# Altium PCB mb997.PcbDoc (part 4 of 4)
Units mil, origin at the board's own origin, x right, y up, seen from the top; angles counter-clockwise.
Board outline 2598.43 x 3818.9 mil, 2 copper layers (Top, Bottom), stack 62.402 mil thick; 189 components, 183 nets, 746 pads, 491 vias.
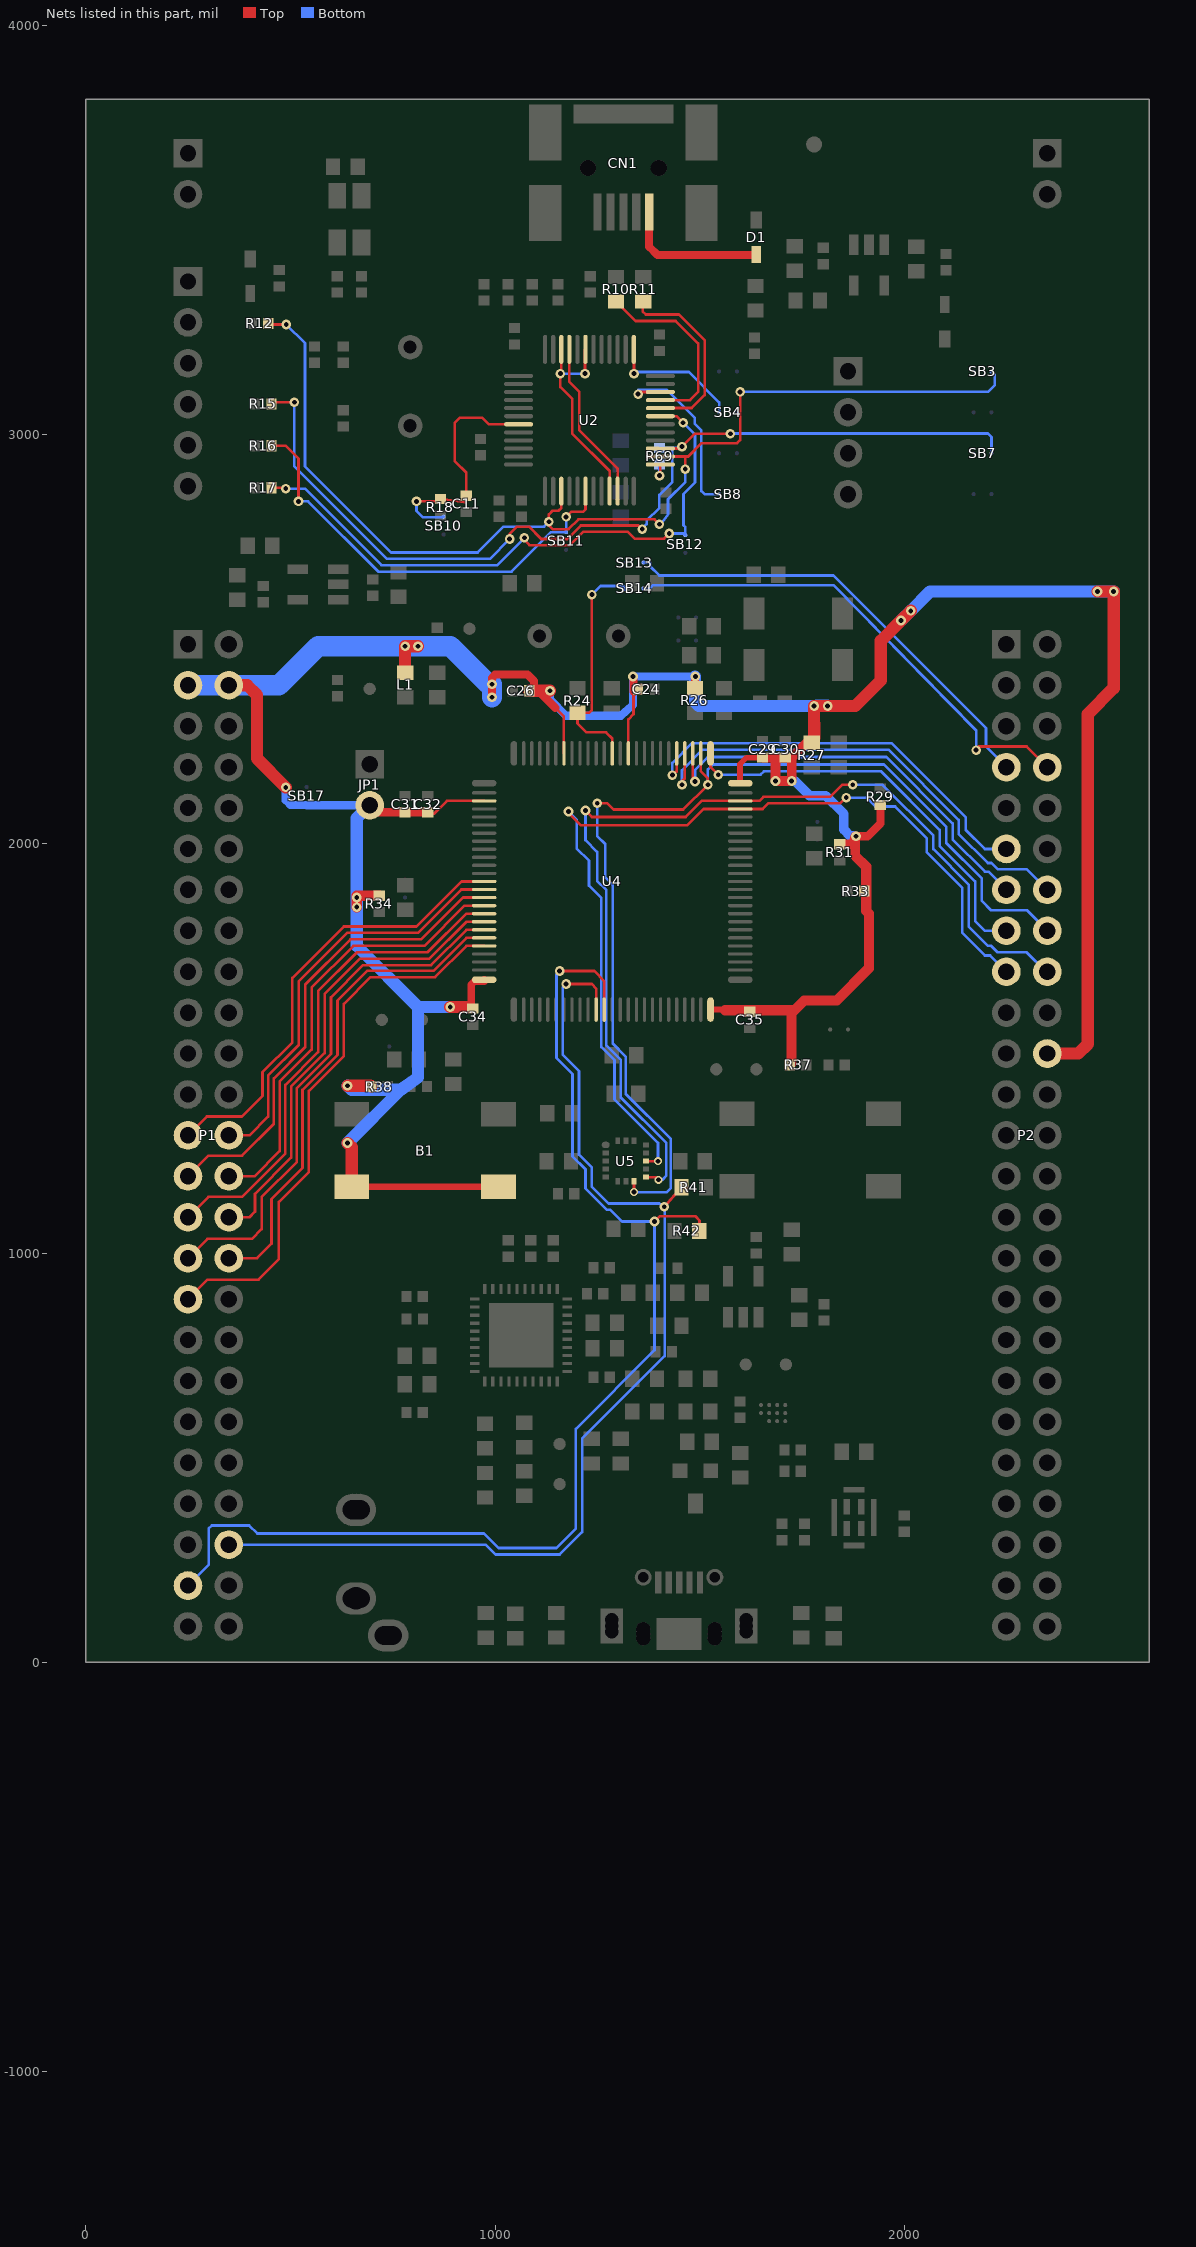
[diagram p4: the nets of this part, all layers, seen from the top]

## Via types
v1: diameter 23.62, hole 11.81, Top to Bottom, 484 vias
v2: diameter 19.68, hole 11.81, Top to Bottom, 7 vias

## Nets (pads, with @x,y where several pads share a name; then routed paths per layer and width w, separated by ;. In a path a pad name is that pad's centre, name@x,y a point inside that pad or via, vN(x,y) a via of type N, cw(c..) or ccw(c..) an arc to the next point about the centre after c; other vN are vias at no path point) (continued)
PD14: P1.46 R41.2 U4.61 | length 2702.5
  Top w6.5: v1(1173.23,1657.48) 1236.25,1657.48 1246.59,1645.95 U4.61@1246.59,1594.96 ; v1(1413.21,1112.9) R41.2@1455.21,1160.9
  Bottom w6.5: P1.46@349.21,287.4 976.54,287.4 1000.65,263.3 1157.55,263.3 1212.64,318.39 1212.64,546.62 1414.21,748.19 1414.21,1117.9 v1(1413.21,1112.9) 1403.75,1118.9 1401.52,1121.13 1276.71,1121.13 1236.25,1161.59 1236.25,1208.66 1204.72,1240.19 1204.72,1444.88 1165.35,1484.25 1165.35,1649.61 v1(1173.23,1657.48)
PD15: P1.47 R42.2 U4.62 | length 3032.8
  Top w6.5: v1(1157.48,1688.98) 1242.67,1688.98 1266.28,1664.16 U4.62@1266.28,1594.96 ; v1(1389.21,1076.9) 1402.21,1089.9 1488.83,1089.9 1499.21,1079.52 R42.2@1498.21,1053.9
  Bottom w6.5: P1.47@249.21,187.4 299.72,237.91 299.72,326.26 307.59,334.13 398.91,334.13 418.58,314.45 972.61,314.45 1008.02,279.04 1149.68,279.04 1196.9,326.26 1196.9,570.23 1389.21,762.54 v1(1389.21,1076.9) 1309.7,1076.9 1281.21,1105.39 1273.01,1105.39 1220.51,1157.89 1220.51,1204.72 1188.98,1236.26 1188.98,1437.01 1149.61,1476.38 1149.61,1681.1 v1(1157.48,1688.98)
PE0: P2.17 U4.97 U5.11 | length 2349.7
  Top w6.5: v1(1179.21,2078.9) 1179.21,2075.11 1209.21,2045.11 1469.21,2045.11 1509.21,2085.11 U4.97@1598.96,2085.11 1653.36,2085.11 1667.06,2098.81 1842.24,2098.81 1856.18,2112.75 v1(1857.98,2112.75) ; U5.11@1368.43,1224.8 1368.43,1224.41 v2(1397.64,1224.41)
  Bottom w6.5: v1(1179.21,2078.9) 1199.21,2058.9 1199.21,1988.9 1229.21,1958.9 1229.21,1897.64 1259.37,1867.48 1259.37,1503.46 1291.34,1471.5 1291.34,1375.47 1397.64,1269.18 v2(1397.64,1224.41) ; v1(1857.98,2112.75) 1907.01,2112.75 1928.81,2090.95 1977.16,2090.95 2054.73,2013.38 2054.73,1978.96 2141.3,1892.39 2141.3,1782.21 2196.39,1727.12 2209.5,1727.12 P2.17@2249.21,1687.4
PE1: P2.18 U4.98 U5.9 | length 2471.2
  Top w6.5: v1(1220.51,2081.27) 1236.25,2065.53 1465.31,2065.53 1504.58,2104.8 U4.98@1598.96,2104.8 1645.49,2104.8 1655.59,2114.9 1818.63,2114.9 1847.96,2144.23 v1(1873.72,2144.23) ; U5.9@1368.43,1185.43 1399.21,1185.43 v2(1399.21,1178.9)
  Bottom w6.5: v1(1220.51,2081.27) 1220.51,2008.9 1249.21,1980.2 1249.21,1909.45 1271.65,1887.01 1271.65,1507.24 1306.46,1472.44 1306.46,1380.63 1418.19,1268.9 1418.19,1188.9 1408.19,1178.9 v2(1399.21,1178.9) ; v1(1873.72,2144.23) 1946.38,2144.23 2070.47,2020.14 2070.47,1986.83 2157.04,1900.26 2157.04,1797.95 2204.26,1750.73 2212.13,1750.73 2227.87,1734.99 2298.7,1734.99 2346.29,1687.4 P2.18@2349.21,1687.4
PE2: P2.15 U4.1 | length 1009.2
  Top w6.5: U4.1@1526.12,2220.94 1526.12,2186.9 1527.21,2186.9 v1(1545.21,2168.9)
  Bottom w6.5: v1(1545.21,2168.9) 1648.53,2168.9 1656.53,2176.9 1943.36,2176.9 2086.21,2034.05 2086.21,1994.7 2172.78,1908.13 2172.78,1811.01 2196.39,1787.4 P2.15@2249.21,1787.4
PE3: P2.16 U4.2 U5.8 | length 2616.6
  Top w6.5: v1(1249.21,2098.9) 1274.18,2098.9 1289.21,2083.87 1459.21,2083.87 v1(1519.57,2144.23) 1519.57,2159.97 1502.5,2177.04 U4.2@1502.5,2220.94 ; U5.8@1338.9,1175.59 1339.21,1175.28 v2(1339.21,1148.9)
  Bottom w6.5: v1(1249.21,2098.9) 1249.21,2018.9 1269.21,1998.9 1269.21,1917.32 1287.24,1899.29 1287.24,1511.65 1318.9,1480 1318.9,1389.21 1429.21,1278.9 1429.21,1158.9 1419.21,1148.9 v2(1339.21,1148.9) ; v1(1519.57,2144.23) 1519.57,2181.44 1532.03,2193.9 1949.97,2193.9 2101.95,2041.92 2101.95,2002.57 2188.52,1916 2188.52,1860.91 2211.83,1837.6 2299.01,1837.6 P2.16@2349.21,1787.4
PE4: P2.13 U4.3 | length 1034.1
  Top w6.5: U4.3@1482.81,2220.94 1482.81,2152.1 v1(1488.09,2152.1)
  Bottom w6.5: v1(1488.09,2152.1) 1488.09,2180.43 1519.56,2211.9 1955.58,2211.9 2117.69,2049.79 2117.69,2010.44 2196.39,1931.74 2204.88,1931.74 P2.13@2249.21,1887.4
PE5: P2.14 U4.4 | length 1190.1
  Top w6.5: v1(1456.61,2144.23) 1456.61,2153.45 1463.13,2159.97 U4.4@1463.13,2220.94
  Bottom w6.5: v1(1456.61,2144.23) 1456.61,2179.67 1506.84,2229.9 1961.19,2229.9 2132.58,2058.51 2132.58,2024.48 2203.84,1953.23 2212.56,1953.23 2227.87,1937.91 2298.7,1937.91 P2.14@2349.21,1887.4
PE6: P2.11 U4.5 | length 1050.3
  Top w6.5: v1(1433,2167.84) 1440.87,2175.71 1443.44,2175.71 U4.5@1443.44,2220.94
  Bottom w6.5: v1(1433,2167.84) 1433,2197.9 1481,2245.9 1968.8,2245.9 2149.46,2065.24 2149.46,2034.33 2196.39,1987.4 P2.11@2249.21,1987.4
PE7: P1.25 U4.38 | length 1106.9
  Top w6.5: P1.25@249.21,1287.4 295.43,1333.62 381.21,1333.62 431.21,1383.62 431.21,1441.77 504.34,1514.9 504.34,1672.03 630.26,1797.95 807.52,1797.95 917.52,1907.95 U4.38@972.97,1907.95
PE8: P1.26 U4.39 | length 1022.5
  Top w6.5: P1.26@349.21,1287.4 399.21,1287.4 445.21,1333.4 445.21,1434.03 520.08,1508.9 520.08,1664.16 638.13,1782.21 811.27,1782.21 917.33,1888.26 U4.39@972.97,1888.26
PE9: P1.27 U4.40 | length 1160.4
  Top w6.5: P1.27@249.21,1187.4 299.72,1237.91 381.21,1237.91 459.21,1315.91 459.21,1426.29 535.82,1502.9 535.82,1656.29 646,1766.47 819.14,1766.47 921.25,1868.58 U4.40@972.97,1868.58
PE10: P1.28 U4.41 | length 1085.6
  Top w6.5: P1.28@349.21,1187.4 411.21,1187.4 473.21,1249.4 473.21,1418.55 551.56,1496.9 551.56,1648.42 653.87,1750.73 827.01,1750.73 925.18,1848.89 U4.41@972.97,1848.89
PE11: P1.29 U4.42 | length 1216.8
  Top w6.5: P1.29@249.21,1087.4 299.2,1137.39 381.21,1137.39 487.21,1243.39 487.21,1410.81 567.3,1490.9 567.3,1640.55 661.74,1734.99 835.1,1734.99 929.32,1829.21 U4.42@972.97,1829.21
PE12: P1.30 U4.43 | length 1134.6
  Top w6.5: P1.30@349.21,1087.4 399.21,1087.4 413.02,1101.21 413.02,1144.7 501.21,1232.9 501.21,1406.9 583.04,1488.73 583.04,1632.68 669.61,1719.25 839.05,1719.25 929.32,1809.52 U4.43@972.97,1809.52
PE13: P1.31 U4.44 | length 1288.5
  Top w6.5: P1.31@249.21,987.4 296.37,1034.56 405.21,1034.56 429.21,1058.56 429.21,1136.9 515.21,1222.9 515.21,1402.9 598.78,1486.47 598.78,1624.81 677.48,1703.51 842.99,1703.51 929.32,1789.84 U4.44@972.97,1789.84
PE14: P1.32 U4.45 | length 1201.5
  Top w6.5: P1.32@349.21,987.4 417.77,987.4 453.24,1022.87 453.24,1131.9 529.21,1207.87 529.21,1398.9 614.52,1484.21 614.52,1616.94 687.2,1689.61 848.78,1689.61 929.32,1770.15 U4.45@972.97,1770.15
PE15: P1.33 U4.46 | length 1353.7
  Top w6.5: P1.33@249.21,887.4 296.89,935.08 421.39,935.08 471.21,984.9 471.21,1124.9 544.71,1198.4 544.71,1396.4 630.26,1481.95 630.26,1609.07 695.27,1674.08 853.19,1674.08 929.58,1750.47 U4.46@972.97,1750.47
PH0: P2.7 SB13.2 | length 1126.1
  Bottom w6.5: SB13.2@1362.18,2687.26 1378.81,2687.26 1378.81,2678.18 1401.21,2655.78 1826.5,2655.78 2199.21,2283.07 2199.21,2237.4 P2.7@2249.21,2187.4
PH1: P2.8 SB14.2 | length 1214
  Top w6.5: v1(2175.21,2228.9) 2181.21,2234.9 2181.21,2237.91 2298.7,2237.91 P2.8@2349.21,2187.4
  Bottom w6.5: SB14.2@1362.18,2624.3 1377.97,2624.3 1385.84,2632.17 1826.5,2632.17 2175.21,2277.46 v1(2175.21,2228.9)
PH1-OSC_OUT: R24.2 SB14.1 U4.13 | length 588.8
  Top w6.5: v1(1236.21,2608.9) 1236.21,2326.9 1229.21,2319.9 R24.2@1201.21,2319.9 1201.21,2293.9 1222.84,2272.27 1270.59,2272.27 1285.96,2256.9 U4.13@1285.96,2220.94
  Bottom w6.5: v1(1236.21,2608.9) 1257.21,2629.9 1313.21,2629.9 1313.21,2618.63 ; 1311.84,2617.27 1313.21,2618.63 ; SB14.1@1318.88,2624.3 1313.21,2618.63
STM_JTCK: SB4.2 U2.37 | length 324.4
  Top w6.5: U2.37@1338.61,3208.23 1338.61,3198.9 1339.21,3198.29 v1(1339.21,3148.9)
  Bottom w6.5: v1(1339.21,3148.9) 1343.21,3152.89 1473.21,3152.89 1547.2,3078.9 SB4.2@1547.2,3054.37
STM_JTMS: SB8.2 U2.34 | length 468.1
  Top w6.5: v1(1349.21,3098.9) 1349.21,3103.59 1348.91,3103.9 U2.34@1403.57,3103.9
  Bottom w6.5: v1(1349.21,3098.9) 1349.21,3108.9 1419.21,3108.9 1487.96,3040.15 1487.96,3026.02 1503.83,3010.15 1503.83,2862.24 1511.7,2854.37 SB8.2@1547.2,2854.37
STM_RST: C11.2 R18.1 SB10.2 U2.7 | length 591.6
  Top w6.5: v1(807.81,2836.7) 856.53,2836.7 R18.1@866.14,2842.83 924.81,2834.96 928.27,2838.42 929.21,2838.42 C11.2@929.13,2850.71 929.21,2906.9 901.41,2934.7 901.41,3029.24 913.58,3041.41 968.16,3041.41 984.41,3025.16 U2.7@1057.11,3025.16
  Bottom w6.5: v1(807.81,2836.7) 807.81,2813.3 823.41,2797.7 870.21,2797.7 871.73,2799.21 SB10.2@874.02,2799.21
SWIM: U2.22 U2.45 | length 395.4
  Top w6.5: U2.45@1181.13,3208.23 1181.13,3128.92 1205.23,3104.82 1205.23,3011.33 1299.24,2917.32 U2.22@1299.24,2861.77
SWIM_IN: U2.21 U2.43 U2.46 | length 517.1
  Top w6.5: U2.46@1161.44,3208.23 1161.44,3153.54 1159.21,3151.32 v1(1159.21,3148.9) 1159.21,3116.4 1188.01,3087.6 1188.01,3003.14 1279.55,2911.6 U2.21@1279.55,2861.77 ; v1(1219.21,3148.9) 1219.21,3206.94 U2.43@1220.5,3208.23
  Bottom w6.5: v1(1159.21,3148.9) v1(1219.21,3148.9)
T_JTCK: R12.2 SB3.1 U2.15 U2.26 | length 2706.2
  Top w6.5: R12.2@445.2,3271.65 447.95,3268.9 v1(489.21,3268.9) ; U2.15@1161.44,2861.77 1161.44,2821.1 1154.17,2813.82 1140.14,2813.82 1131.21,2804.9 v1(1131.21,2786.9) 1131.21,2777.9 1140.21,2768.9 1179.21,2768.9 1203.21,2792.9 1389.21,2792.9 v1(1401.21,2780.9) ; U2.26@1403.57,2946.42 1464.48,2946.42 ; v1(1464.48,2915.49) 1464.48,2946.42 ; v1(1598.43,3104.37) 1598.43,2986.4 1590.93,2978.9 1504.19,2978.9 1471.71,2946.42 1464.48,2946.42
  Bottom w6.5: v1(489.21,3268.9) 535.31,3223.3 535.31,2922 745.41,2711.9 957.21,2711.9 1020.21,2774.9 1119.21,2774.9 v1(1131.21,2786.9) ; v1(1401.21,2780.9) 1404.38,2780.9 1422.38,2804.9 1422.38,2841.91 1464.48,2884.01 v1(1464.48,2915.49) ; v1(1598.43,3104.37) 2204.72,3104.37 2220.47,3120.12 2220.47,3146.46 SB3.1@2212.56,3154.37
T_JTMS: R15.2 R69.2 SB7.1 U2.27 | length 2380.6
  Top w6.5: R15.2@453.07,3074.8 457.17,3078.9 v1(509.21,3078.9) ; v1(1035.21,2744.9) 1035.21,2756.9 1053.21,2774.9 1082.49,2774.9 1112.49,2744.9 1176.21,2744.9 1209.21,2777.9 1350.21,2777.9 v1(1359.21,2768.9) ; U2.27@1403.57,2966.1 1448.74,2966.1 v1(1456.61,2970.58) 1488.09,3002.06 v1(1574.66,3002.06)
  Bottom w6.5: v1(509.21,3078.9) 509.21,2922.5 735.41,2696.3 987.21,2696.3 1035.21,2744.3 v1(1035.21,2744.9) ; v1(1359.21,2768.9) 1359.21,2770.07 1370.04,2780.9 1370.04,2789.57 1401.13,2820.66 1401.13,2852.14 1433,2884.01 1433,2966.97 ; R69.2@1401.52,2966.97 1433,2966.97 ; v1(1456.61,2970.58) 1456.61,2968.77 1454.81,2966.97 1433,2966.97 ; v1(1574.66,3002.06) 1575.09,3002.48 2204.26,3002.48 2212.56,2994.19 SB7.1@2212.56,2954.37
T_NRST: R16.2 SB11.1 U2.18 | length 1085.7
  Top w6.5: R16.2@453.07,2972.44 488.19,2972.44 519.21,2941.42 v1(519.21,2836.7) ; v1(1173.21,2798.9) 1185.57,2811.26 1214.85,2811.26 1220.5,2816.9 U2.18@1220.5,2861.77
  Bottom w6.5: v1(519.21,2836.7) 542.61,2836.7 714.21,2665.1 1040.21,2665.1 1136.7,2761.58 SB11.1@1173.21,2761.58 v1(1173.21,2798.9)
T_SWDIO_IN: R69.1 U2.25 | length 56.2
  Top w6.5: v1(1401.52,2899.75) 1403.57,2899.75 U2.25@1403.57,2926.73
  Bottom w6.5: v1(1401.52,2899.75) R69.1@1401.52,2926.97
T_SWO: R17.2 SB12.1 U2.31 | length 1519.3
  Top w6.5: R17.2@453.07,2870.08 485.83,2870.08 v1(488.01,2867.9) ; v1(1071.21,2747.9) 1071.21,2741.9 1083.21,2729.9 1182.21,2729.9 1215.21,2762.9 1323.21,2762.9 1340.58,2745.53 1412.58,2745.53 v1(1425.13,2758.09) ; U2.31@1403.57,3044.84 1443.27,3044.84 v1(1459.21,3028.9)
  Bottom w6.5: v1(488.01,2867.9) 534.81,2867.9 722.01,2680.7 1005.21,2680.7 1071.21,2746.7 v1(1071.21,2747.9) ; v1(1425.13,2758.09) 1460.56,2758.09 SB12.1@1464.48,2754.16 1464.48,2773.83 1460.23,2778.08 1460.23,2854.85 1488.09,2882.71 1488.09,3000.02 v1(1459.21,3028.9)
U5V: CN1.1 D1.1 | length 354.8
  Top w19.68: CN1.1@1376.23,3543.35 1376.23,3458.9 1396.23,3438.9 1636.46,3438.9 D1.1@1637.76,3440.2
USB_DM: R11.2 U2.32 | length 462.5
  Top w6.5: R11.2@1362.17,3325.16 1360.21,3325.16 1360.21,3301.12 1368.08,3293.25 1449.12,3293.25 1511.7,3230.66 1511.7,3096.5 1480.22,3065.02 1403.57,3065.02 U2.32@1403.57,3064.53
USB_DP: R10.2 U2.33 | length 462.1
  Top w6.5: R10.2@1295.24,3325.16 1342.89,3277.51 1440.87,3277.51 1495.96,3222.42 1495.96,3104.37 1475.81,3084.21 U2.33@1403.57,3084.21
VDD: B1.3 B1.4 C24.1 C26.2 C29.2 C30.2 C31.2 C32.2 C34.2 C35.1 JP1.2 L1.1 P1.3 P1.4 P2.22 R26.1 R27.2 R29.1 R31.2 R33.1 R34.1 R37.2 R38.2 SB17.2 U4.11 U4.19 U4.28 U4.50 U4.75 U4.100 | length 9415.6
  Top w6.5: C32.2@834.88,2077.01 838.49,2073.4 850.7,2073.4 882.1,2104.8 U4.28@972.97,2104.8 ; 1102.36,2374.02 1104.86,2374.02 ; 1146.81,2332.06 1167.85,2311.02 U4.19@1167.85,2220.94 ; U4.11@1325.33,2220.94 1325.33,2303.9 1338.11,2316.68 C24.1@1338.11,2372.4 ; 1685.04,2208.66 1685.04,2210.16 ; 1879.42,1971.09 1880.51,1970 ; R33.1@1901.59,1884.52 1901.59,1918.01 1906.43,1922.85
  Top w13.78: U4.100@1598.96,2148.11 1598.96,2151.41 1598.27,2152.1 1598.27,2194.75 1614.01,2210.49 1636.76,2210.49 C29.2@1653.36,2210.8
  Top w15: U4.75@1526.12,1594.96 1559.75,1594.96 1561.71,1592.99
  Top w15.75: B1.3@649.62,1161.92 B1.4@1007.89,1161.92
  Top w18: C34.2@937.19,1601.2 940.8,1597.59 C34.2@941.87,1596.52 ; C34.2@945.06,1597.59 C34.2@941.87,1596.52 ; U4.50@972.97,1667.79 972.97,1664.16 949.74,1664.16 941.87,1656.29 C34.2@941.87,1596.52
  Top w19.68: v1(992.13,2358.27) v1(992.13,2389.76) 992.13,2405.51 1000,2413.39 1078.74,2413.39 1094.49,2397.64 C26.2@1094.49,2374.02 ; v1(1336.71,2408.9) 1337.37,2408.16 1338.11,2407.42 1338.11,2372.4 1339.05,2371.46 1340.53,2372.4 C24.1@1349.21,2377.9 ; R26.1@1488.19,2380.39 1488.19,2407.87 v1(1489.21,2408.9)
  Top w20: JP1.2@693.22,2094.23 710.44,2077.01 C31.2@779.79,2077.01 C32.2@834.88,2077.01 ; 1104.86,2374.02 1119.36,2359.52 1146.81,2332.06 ; v1(1881.59,2018.31) 1909.73,2018.31 1941.21,2049.79 R29.1@1941.21,2094.9
  Top w23.62: C29.2@1653.36,2210.8 1685.04,2210.16 C30.2@1708.45,2210.8 1724.41,2210.16 ; v1(1685.04,2153.54) v1(1724.41,2153.54) 1724.41,2210.16 ; R27.2@1773.21,2246.9 1773.14,2246.26 1760.51,2246.26 1724.41,2210.16 ; R31.2@1842.24,1998.96 1875.16,1998.96 v1@1879.42,2018.31 ; 1879.42,1971.09 v1@1879.42,2018.31 ; v1(1881.59,2018.31) v1@1879.42,2018.31
  Top w25: v1(661.74,1845.17) v1(661.74,1868.78) 661.74,1873.04 R34.1@716.83,1873.04 ; 1561.71,1592.99 1637.8,1592.99 ; C35.1@1621.88,1589.72 1637.8,1592.99 ; v1(1685.04,2153.54) 1685.04,2208.66 ; R37.2@1719.93,1459.54 1724.05,1463.65 1724.05,1483.16 1723.95,1522.5 1723.95,1585.46 ; 1880.51,1970 1906.43,1944.07 1906.43,1922.85 1906.43,1836.07 1913.07,1829.43 1913.07,1695.64 1834.37,1616.94 1755.43,1616.94 1723.95,1585.46 ; 1637.8,1592.99 1723.95,1592.99 1723.95,1585.46
  Top w30: P1.4@349.21,2387.4 394.16,2387.4 417.77,2363.79 417.77,2208.21 v1(488.19,2137.8) ; v1(639.21,1268.9) 649.62,1258.49 B1.3@649.62,1161.92 ; v1(639.21,1408.9) 695.21,1408.9 R38.2@697.21,1406.9 ; L1.1@779.79,2418.2 v1(779.79,2482.64) v1(811.27,2482.64) ; v1(889.97,1601.2) C34.2@937.19,1601.2 ; C26.2@1082.99,2374.02 1094.49,2374.02 1102.36,2374.02 ; 1104.86,2374.02 v1(1133.86,2374.02) ; R27.2@1773.21,2246.9 1773.67,2253.12 1779.53,2258.98 v1(1779.21,2336.9) 1785.2,2336.66 1879.59,2336.66 1942.04,2399.11 1942.04,2495.86 v1(1991.77,2545.6) v1(2015.38,2569.21) ; P2.22@2349.21,1487.4 2424.62,1487.4 2448.23,1511.01 2448.23,2317.37 2511.19,2380.33 v1(2511.19,2616.43) v1(2471.84,2616.43)
  Bottom w6.5: v1@1133.86,2372.46 v1(1133.86,2374.02)
  Bottom w19.68: v1(488.19,2137.8) 488.19,2106.3 499.21,2095.28 SB17.2@539.21,2095.28 540.26,2094.23 JP1.2@693.22,2094.23 ; v1@1133.86,2372.46 1133.86,2352.33 1173.29,2312.9 1307.08,2312.9 1334.1,2336.51 ; v1(1336.71,2408.9) 1488.09,2408.9 v1(1489.21,2408.9)
  Bottom w20: 1334.1,2336.51 1336.71,2339.13 v1(1336.71,2408.9)
  Bottom w23.62: 1708.66,2153.54 v1(1724.41,2153.54) 1732.06,2153.54 1768.08,2117.53 1807.67,2117.53 1851.8,2073.4 1851.8,2034.64 1867.54,2018.9 1878.5,2018.9 v1(1881.59,2018.31)
  Bottom w25: v1(1685.04,2153.54) 1708.66,2153.54
  Bottom w30: v1(639.21,1268.9) 769.21,1398.9 ; v1(639.21,1408.9) 649.21,1398.9 769.21,1398.9 ; JP1.2@693.22,2094.23 661.74,2062.75 v1(661.74,1868.78) v1(661.74,1845.17) 661.74,1750.73 811.27,1601.2 ; v1(889.97,1601.2) 811.27,1601.2 ; v1@1488.09,2408.9 1488.09,2346.02 1497.21,2336.9 1503.21,2336.96 v1@1779.52,2336.96 ; v1(1779.21,2336.9) v1@1779.52,2336.96 ; v1(1812.21,2336.9) 1812.15,2336.96 1811.06,2338.05 v1@1784.99,2338.05 ; v1(1991.77,2545.6) v1(2015.38,2569.21) 2062.6,2616.43 v1(2471.84,2616.43) v1(2511.19,2616.43) ; 769.21,1398.9 811.27,1428.9 811.27,1601.2 ; v1@1779.52,2336.96 1783.9,2336.96 v1@1784.99,2338.05 ; v1@1779.52,2336.96 v1@1784.99,2338.05
  Bottom w50: P1.3@249.21,2387.4 P1.4@349.21,2387.4 471.69,2387.4 566.93,2482.64 v1(779.79,2482.64) v1(811.27,2482.64) 890.76,2482.64 983.63,2389.76 v1(992.13,2389.76) v1(992.13,2358.27)
pads on no net: CN1.6 CN1.7 CN1.8 CN1.9 CN1.10 CN1.11 CN1.12 CN5.0/3 CN5.0/4 CN5.0/5 CN5.6 CN5.6/2 CN5.6/3 CN5.6/4 CN5.6/5 CN5.6/6 P1.48 U2.4 U2.11 U2.12 U2.13 U2.14 U2.16 U2.17 U2.19 U2.28 U2.38 U2.39 U2.40 U2.41 U2.42 U5.2 U5.3 U7.4 U7.6 U7.7 U7.9 U7.20 U7.23 U7.24 U7.25 U7.26 U7.36 U8.A2 U8.B1 U8.B2 U8.C2 X3.2 X3.3

## Polygon pours and split planes (outlines as drawn)
GND on Bottom "Bottom-GND" (hatched 45Degree grid 11.81 track 13.78, remove dead copper, pour order 0): 6.89,3793.11 2591.54,3793.11 2591.54,6.89 6.89,6.89
GND on Top "Top-GND" (hatched 45Degree grid 11.81 track 13.78, remove dead copper, pour order 2): 6.89,3785.24 2591.54,3785.24 2591.54,6.89 6.89,6.89

## Keep-outs
Top:
  region: 1516,118 1577,118 1577,77 1516,77
Bottom:
  circle w7.87: c1779.41,3709.21 r29.33
Keep-Out Layer:
  the board outline again, w10

## Other copper
Top:
  pour cut-out: 1110.7,503.8 1110.7,381.8 1203.7,381.8 1203.7,503.8
  pour cut-out: 1778.78,774.41 1656.78,774.41 1656.78,681.41 1778.78,681.41
  pour cut-out: 1706.76,1495.68 1584.76,1495.68 1584.76,1402.68 1706.76,1402.68
  pour cut-out: 791.47,1616.5 669.47,1616.5 669.47,1523.5 791.47,1523.5
  pour cut-out: 983.79,2456.83 983.79,2578.83 890.79,2578.83 890.79,2456.83
  pour cut-out: 740,2408 740,2530 647,2530 647,2408
  text "TOP Layer" at -33,-1009.81 h118.11
  text ".GTL" at 1643,-1016.69 h118.11
Bottom:
  pour cut-out: 1747.93,2033.42 1824.93,2033.42 1824.93,2103.42 1747.93,2103.42
  pour cut-out: 741,1888 818,1888 818,1958 741,1958
  text "Bottom Layer" at 2736.5,-997.81 h118.11
  text ".GBL" at 1054,-1010.69 h118.11

## Silkscreen, mask and mechanical layers (free items; w line width, h text height)
Silkscreen Top:
  circle w12: c2165.35,2555.12 r15.75
  circle w12: c165.35,3374.02 r17.61
  circle w12: c2165.35,2555.12 r7.87
  circle w12: c157.48,2547.24 r7.87
  circle w12: c1850.39,3232.28 r7.87
  circle w12: c2165.35,2555.12 r17.61
  circle w12: c1850.39,3232.28 r15.75
  circle w12: c165.35,3374.02 r15.75
  circle w12: c1850.39,3232.28 r7.87
  circle w12: c157.48,2547.24 r15.75
  circle w12: c165.35,3374.02 r7.87
  circle w12: c157.48,2547.24 r7.87
  circle w12: c2165.35,2555.12 r7.87
  circle w12: c157.48,2547.24 r17.61
  circle w12: c1850.39,3232.28 r17.61
  circle w12: c165.35,3374.02 r7.87
  lines w5: 442.52,3435.72 462.97,3435.72 ; 678.87,2305.89 707,2305.89 ; 692.94,2295.66 692.94,2316.11 ; 883.35,1569.44 903.81,1569.44 ; 893.58,1555.37 893.58,1583.5 ; 922.66,2354.72 950.78,2354.72 ; 936.72,2344.49 936.72,2364.94 ; 1143.7,605.92 1171.82,605.92 ; 1157.76,595.69 1157.76,616.14 ; 1457.32,1449.18 1477.77,1449.18 ; 1467.55,1435.12 1467.55,1463.24 ; 1529.34,727.91 1549.79,727.91 ; 1539.57,713.85 1539.57,741.97 ; 1678.7,3531.03 1699.15,3531.03 ; 2036.98,3226.53 2057.44,3226.53
  lines w6: 330.71,2704.72 342.52,2692.91 417.32,2692.91 431.1,2679.13 431.1,2673.23 ; 803.15,2578.74 858.27,2578.74 874.02,2594.49 ; 897.84,3419.17 897.84,3379.82 937.19,3379.82 ; 968.67,1388.71 976.54,1380.84 1047.37,1380.84 1070.98,1404.45 ; 1430.55,502.5 1430.55,612.5 ; 1440.87,2466.9 1433,2474.77 1433,2561.34 1472.35,2600.69 ; 1629.75,664.67 1637.62,672.54 1763.54,672.54
  lines w10: 0,0 2598.42,0 2598.42,3818.9 0,3818.9 0,0
  lines w19.68: 1754.92,2833.66 1792.42,2833.66 1792.42,2968.66 1754.92,2968.66 1754.92,2833.66 ; 1754.92,3059.41 1792.42,3059.41 1792.42,3194.41 1754.92,3194.41 1754.92,3059.41
  lines w39.37: 1942.42,2845.1 1964.92,2845.1 1964.92,2965.1 1942.42,2965.1 1942.42,2845.1 ; 1942.42,3070.47 1964.92,3070.47 1964.92,3190.47 1942.42,3190.47 1942.42,3070.47
  text "STM32F407G-DISC1" at 340,3706 h110.24
  text "COM" at 736.18,3496.89 h55
  text "MB997E" at 2199.21,3260.36 h118.11
  text "PWR" at 1549.21,3248.9 h78.74 r90
  text "SWD" at 165.35,3082.68 h118.11 r90
  text "ST-LINK" at 1719.21,2878.9 h98.43 r90
  text "DISCOVERY" at 2061,2835 h98.43 r90
  text "J" at 2147,2833.5 h600
  text "www.st.com/stm32f4-discovery" at 670.17,2703.33 h118.11
  text "GND" at 39.37,2468.9 h78.74
  text "GND" at 413.39,2468.9 h78.74
  text "GND" at 2047.24,2468.9 h78.74
  text "GND" at 2421.26,2468.9 h78.74
  text "VDD" at 39.37,2368.9 h78.74
  text "VDD" at 413.39,2368.9 h78.74
  text "5V" at 2047.24,2368.9 h78.74
  text "5V" at 2421.26,2368.9 h78.74
  text "GND" at 39.37,2268.9 h78.74
  text "NRST" at 413.39,2268.9 h78.74
  text "3V" at 2047.24,2268.9 h78.74
  text "3V" at 2421.26,2268.9 h78.74
  text "PC1" at 39.37,2168.9 h78.74
  text "PC0" at 413.39,2168.9 h78.74
  text "PH0" at 2047.24,2168.9 h78.74
  text "PH1" at 2421.26,2168.9 h78.74
  text "PC3" at 39.37,2068.9 h78.74
  text "PC2" at 413.39,2068.9 h78.74
  text "PC14" at 2047.24,2068.9 h78.74
  text "PC15" at 2421.26,2068.9 h78.74
  text "Idd" at 637.8,1972.44 h78.74
  text "PA1" at 39.37,1968.9 h78.74
  text "PA0" at 413.39,1968.9 h78.74
  text "PE6" at 2047.24,1968.9 h78.74
  text "PC13" at 2421.26,1968.9 h78.74
  text "PA3" at 39.37,1868.9 h78.74
  text "PA2" at 413.39,1868.9 h78.74
  text "PE4" at 2047.24,1868.9 h78.74
  text "PE5" at 2421.26,1868.9 h78.74
  text "PA5" at 39.37,1768.9 h78.74
  text "PA4" at 413.39,1768.9 h78.74
  text "PE2" at 2047.24,1768.9 h78.74
  text "PE3" at 2421.26,1768.9 h78.74
  text "PA7" at 39.37,1668.9 h78.74
  text "PA6" at 413.39,1668.9 h78.74
  text "PE0" at 2047.24,1668.9 h78.74
  text "PE1" at 2421.26,1668.9 h78.74
  text "PC5" at 39.37,1568.9 h78.74
  text "PC4" at 413.39,1568.9 h78.74
  text "PB8" at 2047.24,1568.9 h78.74
  text "PB9" at 2421.26,1568.9 h78.74
  text "PB1" at 39.37,1468.9 h78.74
  text "PB0" at 413.39,1468.9 h78.74
  text "BOOT0" at 2007.87,1468.9 h78.74
  text "VDD" at 2421.26,1468.9 h78.74
  text "GND" at 39.37,1368.9 h78.74
  text "PB2" at 413.39,1368.9 h78.74
  text "PB6" at 2047.24,1368.9 h78.74
  text "PB7" at 2421.26,1368.9 h78.74
  text "PE7" at 39.37,1268.9 h78.74
  text "PE8" at 413.39,1268.9 h78.74
  text "PB4" at 2047.24,1268.9 h78.74
  text "PB5" at 2421.26,1268.9 h78.74
  text "PE9" at 39.37,1168.9 h78.74
  text "PE10" at 413.39,1168.9 h78.74
  text "PD7" at 2047.24,1168.9 h78.74
  text "PB3" at 2421.26,1168.9 h78.74
  text "PE11" at 39.37,1068.9 h78.74
  text "PE12" at 413.39,1068.9 h78.74
  text "User" at 746.21,1068.9 h78.74
  text "PD5" at 2047.24,1068.9 h78.74
  text "PD6" at 2421.26,1068.9 h78.74
  text "Reset" at 1754.21,1054.9 h78.74
  text "PE13" at 39.37,968.9 h78.74
  text "PE14" at 413.39,968.9 h78.74
  text "PD3" at 2047.24,968.9 h78.74
  text "PD4" at 2421.26,968.9 h78.74
  text "PE15" at 39.37,868.9 h78.74
  text "PB10" at 413.39,868.9 h78.74
  text "PD1" at 2047.24,868.9 h78.74
  text "PD2" at 2421.26,868.9 h78.74
  text "PB12" at 413.39,768.9 h78.74
  text "PC12" at 2047.24,768.9 h78.74
  text "PD0" at 2421.26,768.9 h78.74
  text "PB11" at 39.37,767.72 h78.74
  text "PB14" at 413.39,668.9 h78.74
  text "PC10" at 2047.24,668.9 h78.74
  text "PC11" at 2421.26,668.9 h78.74
  text "PB13" at 39.37,665.35 h78.74
  text "PB15" at 39.37,568.9 h78.74
  text "PD8" at 413.39,568.9 h78.74
  text "PA14" at 2047.24,568.9 h78.74
  text "PA15" at 2421.26,568.9 h78.74
  text "PD9" at 39.37,468.9 h78.74
  text "PD10" at 413.39,468.9 h78.74
  text "PA10" at 2047.24,468.9 h78.74
  text "PA13" at 2421.26,468.9 h78.74
  text "PD12" at 413.39,368.9 h78.74
  text "PA8" at 2047.24,368.9 h78.74
  text "PA9" at 2421.26,368.9 h78.74
  text "PD11" at 39.37,366.14 h78.74
  text "PD14" at 413.39,268.9 h78.74
  text "PC8" at 2047.24,268.9 h78.74
  text "PC9" at 2421.26,268.9 h78.74
  text "PD13" at 39.37,263.78 h78.74
  text "PD15" at 39.37,168.9 h78.74
  text "NC" at 413.39,168.9 h78.74
  text "PC6" at 2047.24,168.9 h78.74
  text "PC7" at 2421.26,168.9 h78.74
  text "GND" at 39.37,68.9 h78.74
  text "GND" at 413.39,68.9 h78.74
  text "GND" at 2047.24,68.9 h78.74
  text "GND" at 2421.26,68.9 h78.74
  text "TOP Silksceen Overlay" at -33,-1009.81 h118.11
  text ".GTO" at 1613,-1018.38 h118.11
Silkscreen Bottom:
  lines w7.87: 1507.83,2772.99 1507.83,3192.99 1635.33,3192.99 1635.33,2772.99 1507.83,2772.99 ; 2129.88,2769.06 2129.88,3189.06 2257.38,3189.06 2257.38,2769.06 2129.88,2769.06
  text "DEFAULT" at 2049,2846 h98.43 r270
  text "RESERVED" at 1669,2835 h98.43 r270
  text "I" at 1461,672.01 h500
  text "C" at 1877.08,654.88 h400
  text "E" at 2143.03,642.66 h400
  text "G" at 791.51,636.61 h400
  text "F" at 1080.82,636.13 h400
  text "H" at 1565.03,313.12 h500
  text "Bottom silkscreen Overlay" at 2784,-1008.81 h118.11
  text ".GBO" at 1080,-1013.69 h118.11
Solder Mask Top:
  text "TOP Solder Mask" at -26,-1011.69 h118.11
  text ".GTS" at 1633,-1016.69 h118.11
Solder Mask Bottom:
  text "Bottom Solder Mask" at 2749.91,-998.69 h118.11
  text ".GBS" at 1042,-1006.69 h118.11
Layer_3:
  lines w6: 992.12,1223.9 1559.05,1223.9 ; 1319.21,924.69 1319.21,1491.62 ; 1155.21,1059.06 1155.21,1389.76 1482.21,1389.76 1482.21,1059.06 1155.21,1059.06
Board:
  the board outline again, w10
Drill Drawing:
  circle w10: c3326.33,242.86 r45.3
  lines w1: 0,1909.45 0.03,1909.45 ; 249.21,87.4 249.24,87.4 ; 249.21,2487.4 249.24,2487.4 ; 249.21,3587.4 249.24,3587.4 ; 249.21,3687.4 249.24,3687.4 ; 349.21,87.4 349.24,87.4 ; 1299.21,0 1299.24,0 ; 1299.21,3818.9 1299.24,3818.9 ; 2249.21,87.4 2249.24,87.4 ; 2349.21,87.4 2349.24,87.4 ; 2349.21,3687.4 2349.24,3687.4 ; 2598.43,1909.45 2598.45,1909.45
  lines w10: 3281.04,-187.46 3303.68,-187.46 3326.33,-210.11 3348.98,-187.46 3371.63,-187.46 3348.98,-164.81 3371.63,-142.16 3348.98,-142.16 3326.33,-119.51 3303.68,-142.16 3281.04,-142.16 3303.68,-164.81 3281.04,-187.46 ; 3281.04,84.32 3371.63,84.32 3326.33,-6.27 3281.04,84.32 ; 3281.04,401.4 3371.63,401.4 3371.63,491.99 3281.04,491.99 3281.04,401.4 ; 3281.04,605.24 3326.33,627.89 3371.63,605.24 3348.98,650.53 3371.63,695.83 3326.33,673.18 3281.04,695.83 3303.68,650.53 3281.04,605.24 ; 3281.04,831.72 3303.68,831.72 3303.68,809.07 3348.98,809.07 3348.98,831.72 3371.63,831.72 3371.63,877.02 3348.98,877.02 3348.98,899.67 3303.68,899.67 3303.68,877.02 3281.04,877.02 3281.04,831.72 ; 3281.04,1058.21 3326.33,1012.91 3371.63,1058.21 3326.33,1103.5 3281.04,1058.21 ; 3281.04,1216.75 3281.04,1239.39 3303.68,1262.04 3281.04,1284.69 3281.04,1307.34 3303.68,1307.34 3326.33,1284.69 3348.98,1307.34 3371.63,1307.34 3371.63,1284.69 3348.98,1262.04 3371.63,1239.39 3371.63,1216.75 3348.98,1216.75 3326.33,1239.39 3303.68,1216.75 3281.04,1216.75 ; 3281.04,1420.58 3371.63,1420.58 3371.63,1511.18 3281.04,1511.18 3281.04,1420.58 ; 3299.15,1438.7 3353.51,1438.7 3353.51,1493.06 3299.15,1493.06 3299.15,1438.7
  lines w11.81: 3200.91,-271.26 5736.42,-271.26 ; 3200.91,1563.27 5736.42,1563.27 ; 3724.72,-475.09 3724.72,1767.1 ; 4278.21,-475.09 4278.21,1767.1 ; 5269.12,-475.09 5269.12,1767.1 ; 3200.91,-475.09 5736.42,-475.09 5736.42,1767.1 3200.91,1767.1 3200.91,-475.09
  lines w15: 3249.5,2845.45 3659.41,2845.45 4829.08,2845.45 5688.85,2845.45 6338.68,2845.45 ; 3249.5,2965.45 3659.41,2965.45 4829.08,2965.45 5688.85,2965.45 6338.68,2965.45 ; 3249.5,3085.45 3659.41,3085.45 4829.08,3085.45 5688.85,3085.45 6338.68,3085.45 ; 3249.5,3205.45 3659.41,3205.45 4829.08,3205.45 5688.85,3205.45 6338.68,3205.45 ; 3249.5,3325.45 3659.41,3325.45 4829.08,3325.45 5688.85,3325.45 6338.68,3325.45 ; 3249.5,3445.45 3659.41,3445.45 4829.08,3445.45 5688.85,3445.45 6338.68,3445.45 ; 3249.5,3565.45 6338.7,3565.45 ; 3659.41,3685.45 3659.41,2725.45 ; 4829.08,3685.45 4829.08,2725.45 ; 5688.85,3685.45 5688.85,2725.45 ; 3659.41,2725.45 3249.5,2725.45 3249.5,3685.45 6338.7,3685.45 6338.68,2725.45 ; 3659.41,2725.45 4829.08,2725.45 ; 4829.08,2725.45 5688.85,2725.45 ; 5688.85,2725.45 6338.68,2725.45 ; 6338.68,2725.45 6338.7,2725.45 ; 6338.68,2845.45 6338.7,2845.45 ; 6338.68,2965.45 6338.7,2965.45 ; 6338.68,3085.45 6338.7,3085.45 ; 6338.68,3205.45 6338.7,3205.45 ; 6338.68,3325.45 6338.7,3325.45 ; 6338.68,3445.45 6338.7,3445.45
  text "Layer" at 3309.5,3595.45 h60
  text "Name" at 3719.41,3595.45 h60
  text "Material" at 4889.08,3595.45 h60
  text "Thickness" at 5748.85,3595.45 h60
  text "1" at 3309.5,3475.45 h60
  text "Silkscreen Top" at 3719.41,3475.45 h60
  text "2" at 3309.5,3355.45 h60
  text "Solder Mask Top" at 3719.41,3355.45 h60
  text "Solder Resist" at 4889.08,3355.45 h60
  text "0.020mm" at 5748.85,3355.45 h60
  text "3" at 3309.5,3235.45 h60
  text "Top" at 3719.41,3235.45 h60
  text "Copper" at 4889.08,3235.45 h60
  text "0.018mm" at 5748.85,3235.45 h60
  text "4" at 3309.5,3115.45 h60
  text "Dielectric 1" at 3719.41,3115.45 h60
  text "FR-4" at 4889.08,3115.45 h60
  text "1.550mm" at 5748.85,3115.45 h60
  text "5" at 3309.5,2995.45 h60
  text "Bottom" at 3719.41,2995.45 h60
  text "Copper" at 4889.08,2995.45 h60
  text "0.018mm" at 5748.85,2995.45 h60
  text "6" at 3309.5,2875.45 h60
  text "Solder Mask Bottom" at 3719.41,2875.45 h60
  text "Solder Resist" at 4889.08,2875.45 h60
  text "0.020mm" at 5748.85,2875.45 h60
  text "7" at 3309.5,2755.45 h60
  text "Silkscreen Bottom" at 3719.41,2755.45 h60
  text "Symbol" at 3323.21,1624.42 h118.11
  text "Hit Count" at 3785.87,1624.42 h118.11
  text "Finished Hole Size" at 4339.36,1624.42 h118.11
  text "Plated" at 5330.27,1624.42 h118.11
  text "491" at 3785.87,1420.58 h98.43
  text "0,30mm" at 4339.36,1420.58 h98.43
  text "PTH" at 5330.27,1420.58 h98.43
  text "2" at 3785.87,1216.75 h98.43
  text "0,65mm" at 4339.36,1216.75 h98.43
  text "PTH" at 5330.27,1216.75 h98.43
  text "4" at 3785.87,1012.91 h98.43
  text "0,81mm" at 4339.36,1012.91 h98.43
  text "PTH" at 5330.27,1012.91 h98.43
  text "8" at 3785.87,809.07 h98.43
  text "0,83mm" at 4339.36,809.07 h98.43
  text "PTH" at 5330.27,809.07 h98.43
  text "6" at 3785.87,605.24 h98.43
  text "0,90mm" at 4339.36,605.24 h98.43
  text "NPTH" at 5330.27,605.24 h98.43
  text "2" at 3785.87,401.4 h98.43
  text "1,00mm" at 4339.36,401.4 h98.43
  text "NPTH" at 5330.27,401.4 h98.43
  text "116" at 3785.87,197.56 h98.43
  text "1,02mm" at 4339.36,197.56 h98.43
  text "PTH" at 5330.27,197.56 h98.43
  text "8" at 3785.87,-6.27 h98.43
  text "1,20mm" at 4339.36,-6.27 h98.43
  text "PTH" at 5330.27,-6.27 h98.43
  text "1" at 3785.87,-210.11 h98.43
  text "1,40mm" at 4339.36,-210.11 h98.43
  text "PTH" at 5330.27,-210.11 h98.43
  text "638 Total" at 3785.87,-413.94 h98.43
  text "Drill drawing" at -29,-1005.81 h118.11
  text ".GD1" at 1613,-1019.69 h118.11
TOP_TITLE_BOX:
  circle w10: c2992.16,-1279.66 r51.18
  region: 2973.47,-994.77 2362.16,-994.77 2334.83,-1064.66 2287.16,-1112.89 2232.16,-1039.66 2232.16,-974.66 2277.16,-919.66 2333.7,-904.77 2973.47,-904.77
  region: 2422.16,-1322.7 1998.7,-1322.7 2037.81,-1224.56 2347.16,-1224.56 2364.83,-1194.66 2451.78,-1294.99
  lines w10: 2037.81,-1224.56 2383.94,-1224.56 2263.23,-1085.27 cw(c2334.25,-1008.74) 2343.7,-904.77 3003.7,-904.77 2973.7,-994.77 ; 2168.27,-895.04 cw(c2263.79,-933.24) 2273.1,-830.79 ; 2169.81,-893.76 1998.7,-1322.7 2759.43,-1322.7 ccw(c2769.22,-1215.05) 2869.58,-1255.19 ; 2238.31,-1048.67 2451.78,-1294.99 ; 2248.31,-1048.67 2457.16,-1289.66 ; 2248.31,-1038.67 2457.16,-1279.66 ; 2252.16,-994.77 2763.7,-994.77 ; 2253.31,-1033.67 2462.16,-1274.66 ; 2258.31,-1028.67 2467.16,-1269.66 ; 2263.31,-1023.67 2472.16,-1264.66 ; 2268.31,-1018.67 2477.16,-1259.66 ; 2270.46,-941.8 2479.32,-1182.79 ; 2273.15,-830.8 3038.88,-830.8 2869.62,-1255.1 ; 2273.31,-1013.67 2480.02,-1252.19 ; 2273.31,-1003.67 2482.16,-1244.66 ; 2273.31,-993.67 2482.16,-1234.66 ; 2273.31,-958.67 2482.16,-1199.66 ; 2278.31,-988.67 2487.16,-1229.66 ; 2278.31,-973.67 2487.16,-1214.66 ; 2332.31,-1225.09 ccw(c2336.44,-1204.01) 2348.16,-1186.02 ; 2375.09,-994.24 ccw(c2374.06,-1016.58) 2361.06,-1034.77 2454.17,-1142.2 cw(c2383.15,-1218.73) 2411.99,-1319.07 ; 2622.38,-1314.66 2736.14,-984.77 ; 2631.14,-1312.7 2744.1,-985.11 ; 2636.14,-1312.7 2749.1,-985.11 ; 2646.14,-1312.7 2759.1,-985.11 ; 2656.14,-1312.7 2769.1,-985.11 ; 2666.14,-1312.7 2779.1,-985.11 ; 2676.14,-1312.7 2789.1,-985.11 ; 2686.14,-1312.7 2799.1,-985.11 ; 2696.14,-1312.7 2809.1,-985.11 ; 2706.14,-1312.7 2819.1,-985.11 ; 2714.35,-1314.66 2828.1,-984.77 ; 2828.1,-994.77 2973.47,-994.77 ; 2947.16,-994.66 2977.16,-904.66 ; 2953.7,-994.77 2983.7,-904.77 ; 2963.7,-994.77 2993.7,-904.77
  lines w11.81: -433.2,-1278.85 1929,-1278.85 ; -433.2,-1082 1929,-1082 ; -433.2,-885.15 1929,-885.15 ; 1141.6,-1475.7 1141.6,-885.15 ; 1929,-1475.7 1929,-688.3 ; 2622.38,-1314.66 2714.35,-1314.66 ; -433.19,-1475.7 -433.19,-688.3 3110.1,-688.3 3110.1,-1475.7 -433.2,-1475.7
  text "Project: '.Board_Name'" at -393.83,-814.91 h118.11
  text "Layer:" at -393.82,-1015.07 h118.11
  text "Gerber:" at 1180.54,-1015.07 h118.11
  text "Variant: '.VariantName'" at -393.83,-1211.92 h118.11
  text "Ref: '.Board_Reference'" at 1185.54,-1211.92 h118.11
  text "R" at 2972.16,-1309.66 h60
  text "Date: '.Board_Document_Date'" at -393.83,-1408.77 h118.11
  text "Rev: '.Board_PCB_Revision'" at 1183.29,-1408.77 h118.11
BOTTOM_TITLE_BOX:
  circle w10: c-284.49,-1273.94 r51.18
  region: -265.79,-989.05 345.51,-989.05 372.85,-1058.94 420.51,-1107.17 475.51,-1033.94 475.51,-968.94 430.51,-913.94 373.98,-899.05 -265.79,-899.05
  region: 285.51,-1316.98 708.98,-1316.98 669.87,-1218.83 360.51,-1218.83 342.85,-1188.94 255.9,-1289.27
  lines w10: -286.02,-899.05 -256.02,-989.05 ; -276.02,-899.05 -246.02,-989.05 ; -269.49,-898.94 -239.49,-988.94 ; -266.02,-989.05 -296.02,-899.05 363.98,-899.05 cw(c373.43,-1003.02) 444.45,-1079.55 323.74,-1218.83 669.87,-1218.83 ; -265.79,-989.05 -120.43,-989.05 ; -161.94,-1249.38 -331.21,-825.07 434.53,-825.07 ; -161.91,-1249.47 ccw(c-61.54,-1209.32) -51.75,-1316.98 708.98,-1316.98 537.87,-888.04 ; -120.43,-979.05 -6.67,-1308.94 ; -111.42,-979.39 1.54,-1306.98 ; -101.42,-979.39 11.54,-1306.98 ; -91.42,-979.39 21.54,-1306.98 ; -81.42,-979.39 31.54,-1306.98 ; -71.42,-979.39 41.54,-1306.98 ; -61.42,-979.39 51.54,-1306.98 ; -56.02,-989.05 455.51,-989.05 ; -51.42,-979.39 61.54,-1306.98 ; -41.42,-979.39 71.54,-1306.98 ; -36.42,-979.39 76.54,-1306.98 ; -28.46,-979.05 85.3,-1308.94 ; 220.51,-1223.94 429.37,-982.95 ; 220.51,-1208.94 429.37,-967.95 ; 225.51,-1238.94 434.37,-997.95 ; 225.51,-1228.94 434.37,-987.95 ; 225.51,-1193.94 434.37,-952.95 ; 227.66,-1246.46 434.37,-1007.95 ; 228.36,-1177.07 437.22,-936.08 ; 230.51,-1253.94 439.37,-1012.95 ; 235.51,-1258.94 444.37,-1017.95 ; 240.51,-1263.94 449.37,-1022.95 ; 245.51,-1268.94 454.37,-1027.95 ; 250.51,-1283.94 459.37,-1042.95 ; 250.51,-1273.94 459.37,-1032.95 ; 255.9,-1289.27 469.37,-1042.95 ; 295.69,-1313.34 cw(c324.53,-1213) 253.51,-1136.47 346.62,-1029.05 ccw(c333.61,-1010.85) 332.59,-988.52 ; 359.51,-1180.29 ccw(c371.23,-1198.29) 375.37,-1219.36 ; 434.58,-825.07 cw(c443.89,-927.52) 539.41,-889.31
  lines w11.81: -6.67,-1308.94 85.3,-1308.94 ; 771.31,-1469.98 771.31,-682.57 ; 771.31,-1273.13 3133.51,-1273.13 ; 771.31,-1076.28 3133.51,-1076.28 ; 771.31,-879.43 3133.51,-879.43 ; 1558.71,-1469.98 1558.71,-879.43 ; -409.8,-1469.98 -409.8,-682.57 3133.51,-682.57 3133.51,-1469.98 -409.8,-1469.98
  text "Project: '.Board_Name'" at 3086.5,-809.19 h118.11
  text "Gerber:" at 1512.14,-1009.35 h118.11
  text "Layer:" at 3086.5,-1009.35 h118.11
  text "Ref: '.Board_Reference'" at 1512.14,-1206.2 h118.11
  text "Variant: '.VariantName'" at 3086.5,-1206.2 h118.11
  text "R" at -264.49,-1303.94 h60
  text "Rev: '.Board_PCB_Revision'" at 1514.39,-1403.05 h118.11
  text "Date: '.Board_Document_Date'" at 3086.5,-1403.05 h118.11
Board Dimensions:
  lines w10: -720.79,0 1249.21,0 ; -720.79,3818.9 1249.21,3818.9 ; -670.79,1841.95 -670.79,0 ; -670.79,1976.95 -670.79,3818.9 ; -390.79,2487.4 199.21,2487.4 ; -390.79,3587.4 199.21,3587.4 ; -340.79,2969.9 -340.79,2487.4 ; -340.79,3104.9 -340.79,3587.4 ; 0,1959.45 0,4468.9 ; 249.21,-371.1 249.21,37.4 ; 249.21,3737.4 249.21,4288.9 ; 349.21,-151.1 349.21,37.4 ; 1058.99,-321.1 249.21,-321.1 ; 1058.99,4238.9 249.21,4238.9 ; 1061.26,-101.1 349.21,-101.1 ; 1063.53,4418.9 0,4418.9 ; 1534.89,4418.9 2598.43,4418.9 ; 1537.17,-101.1 2249.21,-101.1 ; 1539.44,-321.1 2349.21,-321.1 ; 1539.44,4238.9 2349.21,4238.9 ; 2249.21,-151.1 2249.21,37.4 ; 2349.21,-371.1 2349.21,37.4 ; 2349.21,3737.4 2349.21,4288.9 ; 2598.43,1959.45 2598.43,4468.9 ; -670.79,0 -695.79,100 -645.79,100 -670.79,0 ; -670.79,3818.9 -695.79,3718.9 -645.79,3718.9 -670.79,3818.9 ; -340.79,2487.4 -365.79,2587.4 -315.79,2587.4 -340.79,2487.4 ; -340.79,3587.4 -315.79,3487.4 -365.79,3487.4 -340.79,3587.4 ; 0,4418.9 100,4393.9 100,4443.9 0,4418.9 ; 249.21,-321.1 349.21,-346.1 349.21,-296.1 249.21,-321.1 ; 249.21,4238.9 349.21,4263.9 349.21,4213.9 249.21,4238.9 ; 349.21,-101.1 449.21,-76.1 449.21,-126.1 349.21,-101.1 ; 2249.21,-101.1 2149.21,-76.1 2149.21,-126.1 2249.21,-101.1 ; 2349.21,-321.1 2249.21,-346.1 2249.21,-296.1 2349.21,-321.1 ; 2349.21,4238.9 2249.21,4263.9 2249.21,4213.9 2349.21,4238.9 ; 2598.43,4418.9 2498.43,4443.9 2498.43,4393.9 2598.43,4418.9
  text "66.000mm" at 1093.53,4381.4 h50
  text "53.340mm" at 1088.99,4201.4 h50
  text "27.940mm" at -548.74,2999.9 h50
  text "97.000mm" at -877.61,1871.95 h50
  text "48.260mm" at 1091.26,-138.6 h50
  text "53.340mm" at 1088.99,-358.6 h50
  text "Board Dimensions" at -73,-1018.8 h118.11

## Text inside footprints (layer, text, board x,y; h text height)
HW3: Layer_7 "Sticker area" at 1519.54,1719.12 h29.53
HW4: Layer_7 "Sticker area" at 1522.17,1198.55 h29.53
U9: Silkscreen Top "1" at 1789,407 h59.06; Layer_14 "4" at 1907.22,398.61 h39.37 r180; Layer_14 "2" at 1870.81,345.46 h39.37 r180; Layer_14 "3" at 1906.24,346.45 h39.37 r180; Layer_14 "1" at 1863.92,392.71 h39.37 r180